# Altium PCB Copy of 701C USB Hub.PcbDoc (part 2 of 2)
Units mil, origin at the board's own origin, x right, y up, seen from the top; angles counter-clockwise.
Board outline 4055.12 x 2244.09 mil, 4 copper layers (Component Side, Ground Plane, Power Plane, Solder Side), stack 61 mil thick; 144 components, 120 nets, 628 pads, 76 vias.
Unrouted connection lines stored in the file: 378.
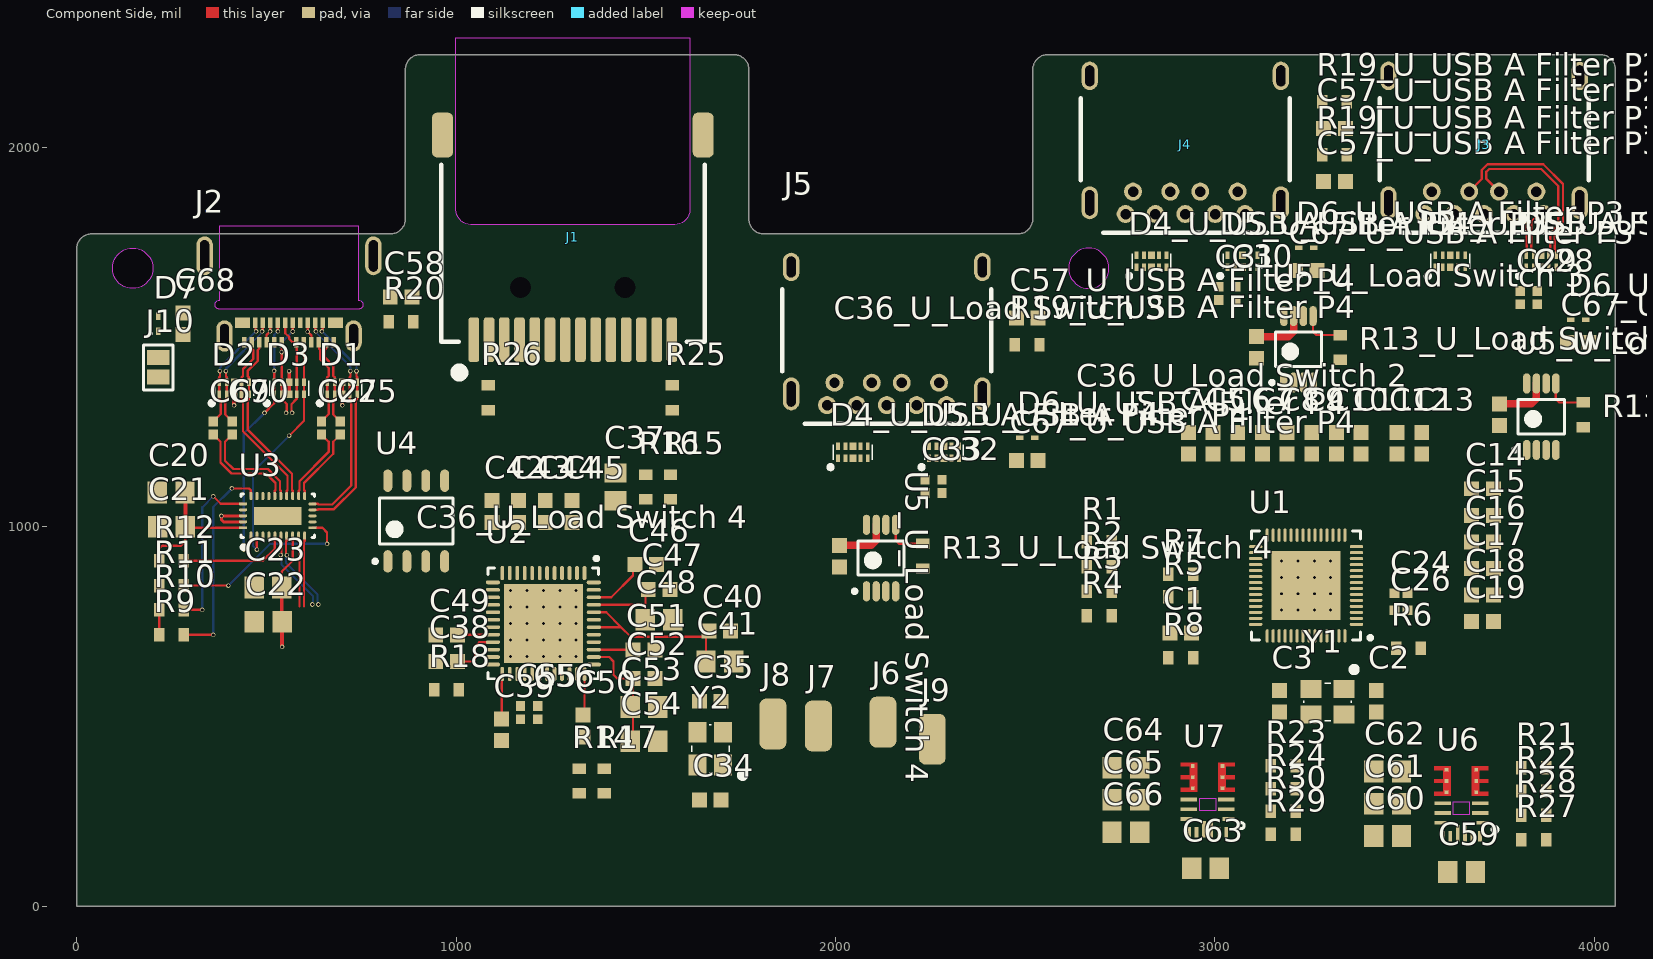
[diagram p0: Component Side view]

## Via types
v1: diameter 19.68, hole 7.87, Component Side to Solder Side, 41 vias
v2: diameter 12, hole 8, Component Side to Solder Side, 35 vias

## Nets (pads, with @x,y where several pads share a name; then routed paths per layer and width w, separated by ;. In a path a pad name is that pad's centre, name@x,y a point inside that pad or via, vN(x,y) a via of type N, cw(c..) or ccw(c..) an arc to the next point about the centre after c; other vN are vias at no path point) (continued)
VBUS3: "C67_U_USB A Filter P3.1" "D6_U_USB A Filter P3.1" "U5_U_Load Switch 3.6" "U5_U_Load Switch 3.8" J4.1
VBUS4: "C67_U_USB A Filter P4.1" "D6_U_USB A Filter P4.1" "U5_U_Load Switch 4.6" "U5_U_Load Switch 4.8" J5.1
"VBUS IN": C68.1 D7.1 J2.A4 J2.A9 J2.B4 J2.B9 J10.2 | length 110.5
  Component Side w6: J2.A9 500.59,1505.59 v2(510,1515) 510,1537.41 J2.B4 ; J2.B9 v2(608.86,1513.86) 618.7,1504.01 J2.A4
VDD12: C4.1 C5.1 C6.1 C7.1 C8.1 C9.1 C10.1 C11.1 C12.1 C13.1 C38.1 C39.1 C40.1 C41.1 C64.1 C65.1 C66.1 J8.1 R23.2 U1.5 U1.12 U1.15 U1.21 U1.28 U1.33 U1.43 U1.49 U2.21 U2.25 U2.30 U2.42 U2.44 U7.7 U7.8 U7.9 | length 734.8
  Component Side w6: C38.1 1045,645 1050,650 1050,685 1060.79,695.79 U2.21 ; C39.1 1120,610.39 U2.25 ; U2.42 1434.84,735.16 ; U2.44 1395.47,774.53 1434.84,735.16 ; C41.1 C40.1@1658.5,717.13 ; C40.1 C40.1@1658.5,717.13 ; 1434.84,735.16 1460,710 1651.38,710 C40.1@1658.5,717.13
VDD12_DISABLE: U2.14 U2.15
VDD25: C42.1 C43.1 C44.1 C45.1 C47.1 C48.1 U2.3 U2.6 U2.9 U2.12 U2.45 | length 219.6
  Component Side w6: U2.45 1499.21,794.21 ; C48.1 1499.21,755.71 1499.21,794.21 ; C47.1 1499.21,827.83 1499.21,794.21
VDD33: C14.1 C15.1 C16.1 C17.1 C18.1 C19.1 C22.1 C23.1 C46.1 C49.1 C50.1 C51.1 C52.1 C53.1 C54.1 C60.1 C61.1 C62.1 J7.1 R1.1 R2.1 R3.1 R8.2 R9.2 R10.2 R11.2 R14.2 R18.2 R21.2 U1.16 U1.31 U1.44 U1.55 U2.20 U2.36 U2.38 U2.39 U2.46 U3.8 U4.8 U6.7 U6.8 U6.9 | length 1216.6
  Component Side w6: R9.2 R10.2 R11.2 ; C23.1 540.51,881.77 569.37,910.63 U3.8 ; C49.1 1004.09,715.47 U2.20 ; C50.1 1338.27,506.89 U2.36 ; U2.38 1403.58,656.42 1415,645 1415,610 1425,600 C52.1 1466.38,442.87 C54.1 ; U2.39 1465.28,676.1 C51.1 ; U2.46 1408.9,813.9 1466.38,871.38 1466.38,895 C46.1
  Component Side w10: C23.1 540.51,750.98 C22.1 v2(541.5,683.5)
pads on no net: "D4_U_USB A Filter P2.4" "D4_U_USB A Filter P2.5" "D4_U_USB A Filter P3.4" "D4_U_USB A Filter P3.5" "D4_U_USB A Filter P4.4" "D4_U_USB A Filter P4.5" "U5_U_Load Switch 2.4" "U5_U_Load Switch 3.4" "U5_U_Load Switch 4.4" J1.11 J1.16 J1.17 J1.SHD J2.A8 J2.B8 U2.13 U2.22 U2.43 U3.3 U3.22 U3.23 U3.24 U3.27 U4.7 U6.4 U6.5 U6.6 U6.10 U6.11 U6.15 U7.4 U7.5 U7.6 U7.10 U7.11 U7.15

## Polygon pours and split planes (outlines as drawn)
no net on Ground Plane (split plane): 351 vertices, not listed, extent 20.1,20.1 4035.02,2224
no net on Power Plane (split plane): 351 vertices, not listed, extent 20.1,20.1 4035.02,2224

## Silkscreen, mask and mechanical layers (free items; w line width, h text height)
Mechanical 2:
  circle w10: c147.64,1681.1 r80
  circle w10: c2667.32,1681.1 r80
  circle w3.94: c147.64,1681.1 r53.15
  circle w0.5: c2667.32,1681.1 r53.15
  circle w0.5: c3709.25,1880.96 r19.68
  circle w0.5: c1307.68,1709.49 r19.68
  circle w0.5: c2921.85,1932.33 r19.68
  circle w0.5: c559.64,1537.84 r19.68
  circle w0.5: c2135.04,1428.78 r19.68
  lines w3.94: 0,0 4055.12,0 4055.12,2204.72 ccw(c4015.75,2204.72) 4015.75,2244.09 2559.06,2244.09 ccw(c2559.06,2204.72) 2519.69,2204.72 2519.69,1811.02 cw(c2480.32,1811.02) 2480.32,1771.65 1811.02,1771.65 cw(c1811.02,1811.02) 1771.65,1811.02 1771.65,2204.72 ccw(c1732.28,2204.72) 1732.28,2244.09 905.51,2244.09 ccw(c905.51,2204.72) 866.14,2204.72 866.14,1811.02 cw(c826.77,1811.02) 826.77,1771.65 240.16,1771.65 39.37,1771.65 ccw(c39.37,1732.28) 0,1732.28 0,0

## Text inside footprints (layer, text, board x,y; h text height)
J1: Mechanical 1 "Connector Edge" at 1032.09,2351.22 h40; Mechanical 1 "Board edge" at 1099.01,2170.12 h40